# EAGLE board me433_pic32_pcb (EAGLE 8.1.0)
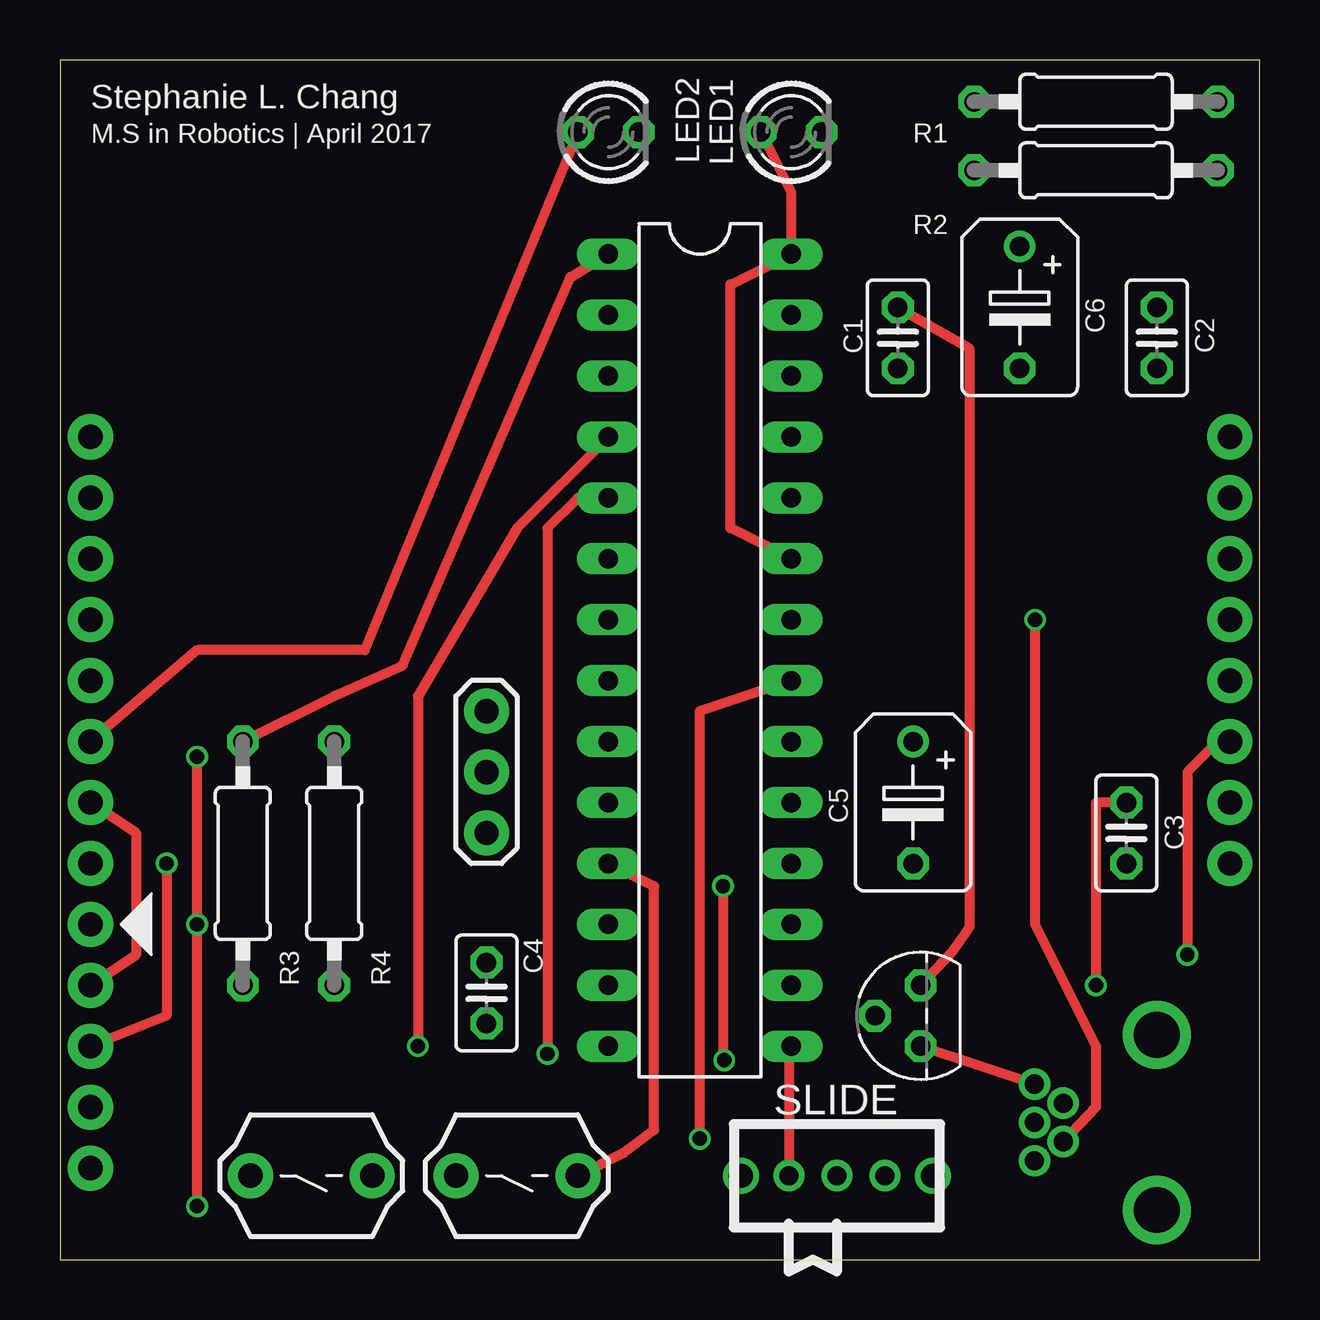
[diagram p0: board, top side]
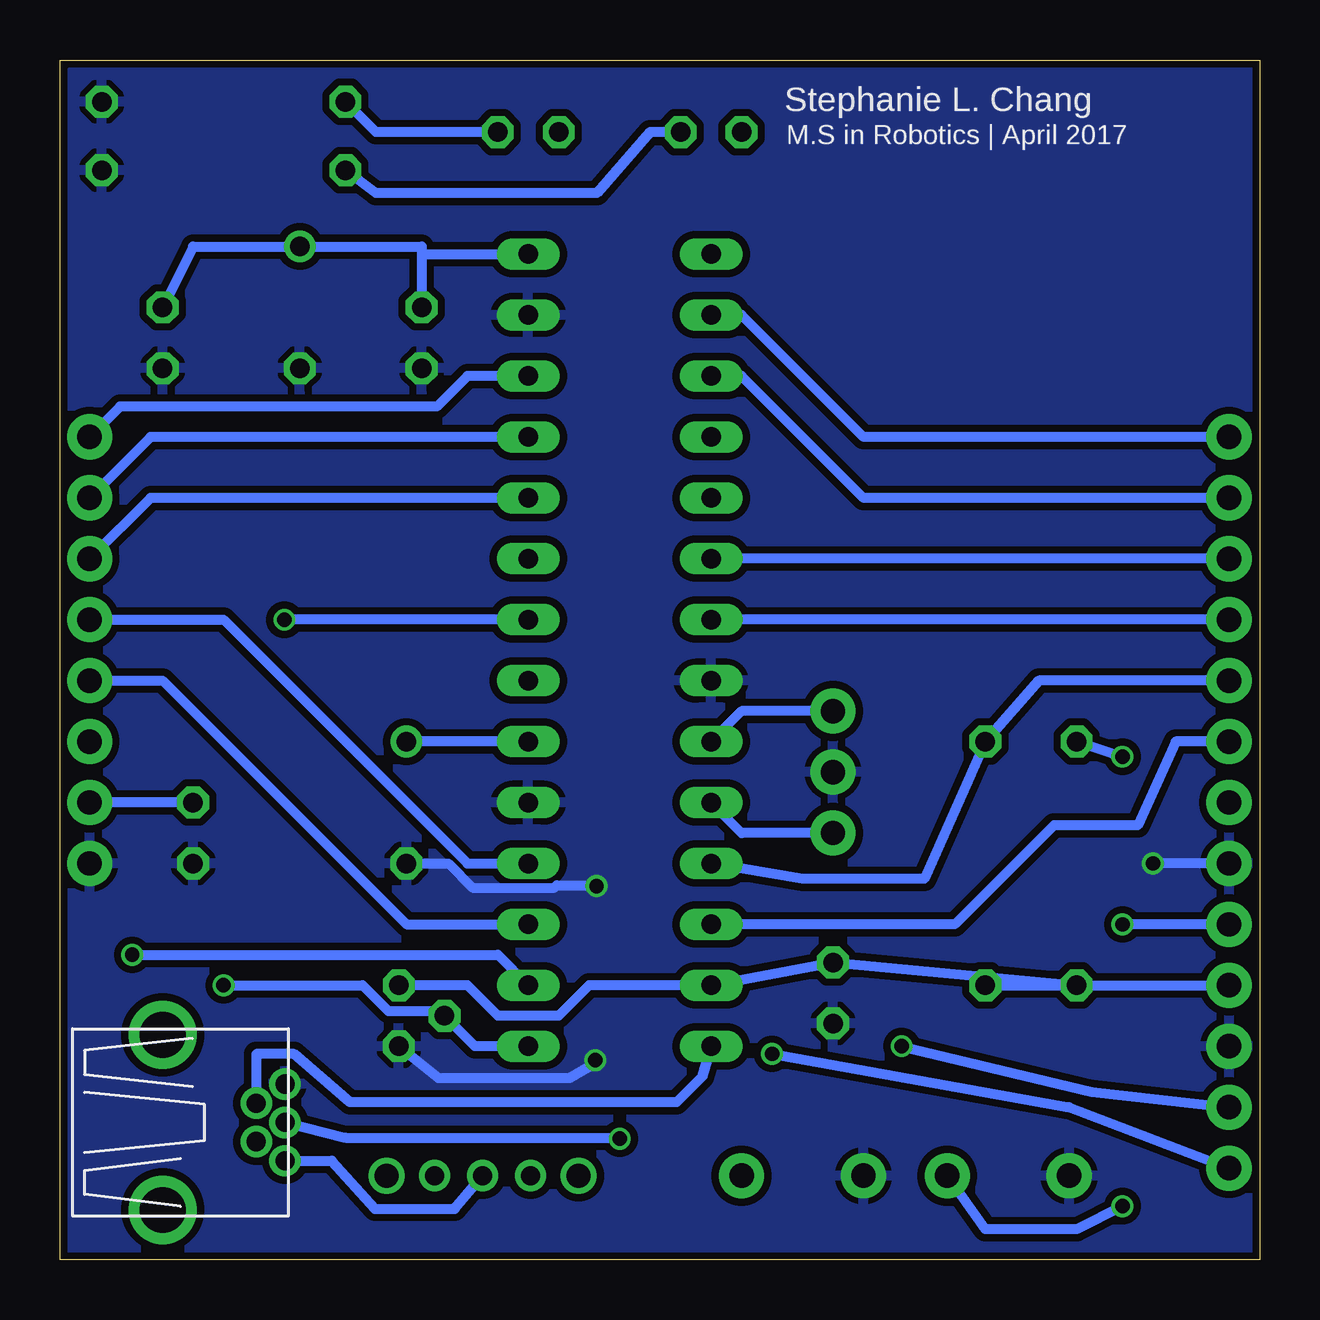
[diagram p1: board, bottom side, seen from below]

Size 50 x 50 mm. Coordinates in mm from the lower left corner, seen from the top.
Outline: 0,0 50,0 50,50 0,50 0,0
Copper layers (1*16): Top 0.035mm / dielectric 1.5mm / Bottom 0.035mm
Design rules "SeeedStudio_2layer_DRU_no_angle_20140221": minimum track width 6mil, minimum drill 12mil, track to track 6mil, track to pad 6mil, pad to pad 6mil, via to via 6mil, smd to smd 0mil, copper to edge 10mil, drill to drill 10mil, minimum pad ring 10mil, minimum via ring 6mil, stop-mask expansion 2mil, vias tented up to drill 100mil, thermal gap 10mil

## Footprints (pad centres in the part's own frame; a part is rotated, then mirrored left to right if it is on the bottom)
C025-025X050 = drill 0.813 octagon: 1 -1.27,0; 2 1.27,0
B45181B = drill 0.813: + -2.54,0 | drill 0.813 octagon: - 2.54,0
USB-MB-H = drill 0.8: D+ 5.1,0; D- 3.9,0.8; GND 5.1,-1.6; ID 3.9,-0.8; VBUS 5.1,1.6 | drill 1.9: P$6 0,-3.65; P$7 0,3.65
LED3MM = drill 0.813 octagon: A -1.27,0; K 1.27,0
0207/10 = drill 0.813 octagon: 1 -5.08,0; 2 5.08,0
DIL28-3 = drill 0.813 long: 1 -16.51,-3.81; 2 -13.97,-3.81; 3 -11.43,-3.81; 4 -8.89,-3.81; 5 -6.35,-3.81; 6 -3.81,-3.81; 7 -1.27,-3.81; 8 1.27,-3.81; 9 3.81,-3.81; 10 6.35,-3.81; 11 8.89,-3.81; 12 11.43,-3.81; 13 13.97,-3.81; 14 16.51,-3.81; 15 16.51,3.81; 16 13.97,3.81; 17 11.43,3.81; 18 8.89,3.81; 19 6.35,3.81; 20 3.81,3.81; 21 1.27,3.81; 22 -1.27,3.81; 23 -3.81,3.81; 24 -6.35,3.81; 25 -8.89,3.81; 26 -11.43,3.81; 27 -13.97,3.81; 28 -16.51,3.81
SLIDE = drill 0.8: 1 -2,0; 2 0,0; 3 2,0 | drill 1: P$1 -4,0; P$2 4,0
TO92 = drill 0.813 octagon: 1 -1.27,0; 2 0,1.905; 3 1.27,0
PB = drill 1.016 pad 1.88: 1 -2.54,0; 2 2.54,0
1X08 = drill 1.016 pad 1.88: 1 0,0; 2 2.54,0; 3 5.08,0; 4 7.62,0; 5 10.16,0; 6 12.7,0; 7 15.24,0; 8 17.78,0
1X05 = drill 1.016 pad 1.88: 1 0,0; 2 2.54,0; 3 5.08,0; 4 7.62,0; 5 10.16,0
OSC = drill 1.016 pad 1.88: 1 -2.54,0; 2 0,0; 3 2.54,0

## Placement (x,y rotation side)
C1  0.1uF  [C025-025X050]  34.92,38.42 270 top
C2  0.1uF  [C025-025X050]  45.72,38.42 270 top
C3  0.1uF  [C025-025X050]  44.45,17.78 270 top
C4  0.1uF  [C025-025X050]  17.78,11.11 270 top
C5  10uF  [B45181B]  35.56,19.05 270 top
C6  10uF  [B45181B]  40.01,39.69 270 top
J1  USB-MB-H  [USB-MB-H]  45.72,5.71 180 top
LED1  Red  [LED3MM]  30.48,46.99 0 top
LED2  Green  [LED3MM]  22.86,46.99 0 top
R1  330  [0207/10]  43.18,48.26 180 top
R2  330  [0207/10]  43.18,45.4 180 top
R3  10k  [0207/10]  7.62,16.51 270 top
R4  10k  [0207/10]  11.43,16.51 270 top
U1  PIC32MX250F128B  [DIL28-3]  26.67,25.4 270 top
U2  SLIDE  [SLIDE]  32.38,3.49 180 top
U3  MCP1702  [TO92]  35.88,10.16 90 top
U4  RESET  [PB]  10.48,3.49 180 top
U5  USER  [PB]  19.05,3.49 180 top
U6  CONN_08  [1X08]  48.77,16.51 90 top
U7  CONN_08  [1X08]  1.27,16.51 90 top
U8  PICKIT3  [1X05]  1.27,13.97 270 top
U9  8MHz  [OSC]  17.78,20.32 270 top

## Library data of the parts
C1-C6 R1-R4 = resistor
J1 U1-U9 = me433_pic32_pcb
LED1 LED2 = led

## Nets
+3V3: C1.1 C2.1 C4.1 C6.+ LED1.A R3.2 R4.2 U1.13 U1.23 U1.28 U3.3 U7.2 U8.2
+5V: C3.1 U1.15 U2.3 U3.2 U6.2
A0: U1.2 U7.8
A1: U1.3 U7.7
A4/LED: LED2.A U1.12 U7.3
B2: U1.6 U7.6
B3: U1.7 U7.5
B4/USER: R4.1 U1.11 U5.1 U7.4
B7: U1.16 U6.3
B8: U1.17 U6.4
B9: U1.18 U6.5
B13: U1.24 U6.6
B14: U1.25 U6.7
B15: U1.26 U6.8
D+: J1.D+ U1.21
D-: J1.D- U1.22
GND: C1.2 C2.2 C3.2 C4.2 C5.- C6.- J1.GND R1.1 R2.1 U1.8 U1.19 U1.27 U3.1 U4.2 U5.2 U6.1 U7.1 U8.3 U9.2
MCLR: R3.1 U1.1 U4.1 U8.1
N$1: LED2.K R2.2
N$2: LED1.K R1.2
N$3: U1.9 U9.1
N$4: U1.10 U9.3
N$6: C5.+ U1.20
PGC: U1.5 U8.5
PGD: U1.4 U8.4
USBID: J1.ID U1.14
VBUS: J1.VBUS U2.2

## Tracks (layer width: path | path; a pad name or v marks a point on that pad's centre or on a via)
+3V3
  Top 0.406: LED1.A 30.48,44.45 U1.28 27.94,40.64 27.94,30.48 U1.23 | U3.3 37.15,12.78 37.9,13.85 37.9,37.99 C1.1 | U7.2 3.17,17.78 3.17,12.7 U8.2
  Bottom 0.406: 34.92,41.91 U1.28 | 34.92,41.91 C1.1 | C2.1 44.45,42.23 C6.+ 34.92,42.23 34.92,41.91 | R3.2 U8.2 | U3.3 33.02,11.43 31.75,10.16 29.21,10.16 27.94,11.43 U1.13 C4.1 R3.2 | R4.2 R3.2
+5V  (via drill 0.6)
  Top 0.406: U1.15 30.39,8.89 U2.3 | C3.1 43.18,19.05 v43.18,11.43
  Bottom 0.406: C3.1 U6.2 | U1.15 32.7,8.89 U3.2 34.18,10.36 36.32,10.36 37.39,11.43 v43.18,11.43
A0
  Bottom 0.406: U7.8 16.51,34.29 21.59,39.37 U1.2
A1
  Bottom 0.406: U7.7 16.51,31.75 21.59,36.83 U1.3
A4/LED
  Top 0.406: LED2.A 12.7,25.4 5.71,25.4 U7.3
  Bottom 0.406: U7.3 3.49,21.59 5.08,18.1 8.57,18.1 12.7,13.97 U1.12
B2
  Bottom 0.406: U7.6 U1.6
B3
  Bottom 0.406: U7.5 U1.7
B4/USER
  Top 0.406: U5.1 23.5,4.45 24.77,5.4 24.77,15.56 U1.11
  Bottom 0.406: U7.4 9.21,24.13 R4.1 13.97,15.88 19.05,15.88 U1.11
B7  (via drill 0.6)
  Top 0.406: U6.3 48.26,21.59 46.99,20.32 v46.99,12.7
  Bottom 0.406: v46.99,12.7 31.75,12.7 U1.16
B8
  Bottom 0.406: U6.4 45.72,24.13 35.56,13.97 U1.17
B9
  Bottom 0.406: U6.5 43.18,26.67 33.02,16.51 U1.18
B13
  Bottom 0.406: U6.6 46.23,31.75 U1.24
B14
  Bottom 0.406: U1.25 46.23,34.29 U6.7
B15
  Bottom 0.406: U1.26 33.02,36.83 34.29,35.56 47.5,35.56 U6.8
D+  (via drill 0.6)
  Top 0.406: v26.67,5.03 26.67,22.86 U1.21
  Bottom 0.406: J1.D+ 38.1,5.08 26.67,5.08 v26.67,5.03
D-  (via drill 0.6)
  Top 0.406: v40.64,26.67 40.64,13.97 43.18,8.89 43.18,6.35 J1.D-
  Bottom 0.406: U1.22 v40.64,26.67
GND  (via drill 0.6)
  Top 0.406: J1.GND U3.1 | v4.45,16.51 4.45,10.16 U8.3 | v27.64,15.57 27.64,8.36 27.69,8.36 v27.69,8.31
  Bottom 0.406: U7.1 v4.45,16.51 | C5.- 33.81,16.51 32.79,15.49 29.4,15.49 29.3,15.6 27.64,15.6 v27.64,15.57 | v27.69,8.31 28.01,7.99 28.76,7.56 34.23,7.56 U3.1
  pour Bottom (isolate 0.305): 0,49.53 49.53,49.53 49.53,0 0,0
MCLR  (via drill 0.6)
  Top 0.406: v5.71,2.22 v5.71,13.97 v5.71,20.95 | R3.1 11.43,23.5 14.29,24.77 21.27,40.96 U1.1
  Bottom 0.406: U8.1 v5.71,13.97 | v5.71,20.95 R3.1 | v5.71,2.22 7.62,1.27 11.43,1.27 U4.1
N$1
  Bottom 0.406: LED2.K 25.4,46.99 27.62,44.45 36.83,44.45 R2.2
N$2
  Bottom 0.406: LED1.K 36.83,46.99 R1.2
N$3
  Bottom 0.406: U9.1 21.59,22.86 U1.9
N$4
  Bottom 0.406: U9.3 21.59,17.78 U1.10
N$6
  Bottom 0.406: U1.20 C5.+
PGC  (via drill 0.6)
  Top 0.406: U1.5 21.59,31.75 20.32,30.48 v20.32,8.57
  Bottom 0.406: v20.32,8.57 7.94,6.35 U8.5
PGD  (via drill 0.6)
  Top 0.406: U1.4 19.05,30.48 14.92,23.5 v14.92,8.89
  Bottom 0.406: v14.92,8.89 6.99,6.99 U8.4
USBID
  Bottom 0.406: J1.ID 41.82,8.57 40.24,8.57 37.91,6.55 24.3,6.55 23.23,7.62 U1.14
VBUS
  Bottom 0.406: J1.VBUS 38.67,4.12 36.87,2.11 33.55,2.11 U2.2

## Text on the board
tPlace: Stephanie L. Chang | M.S in Robotics | April 2017
bPlace: Stephanie L. Chang | M.S in Robotics | April 2017